# EAGLE board Eagle_LED (EAGLE 6.6.0)
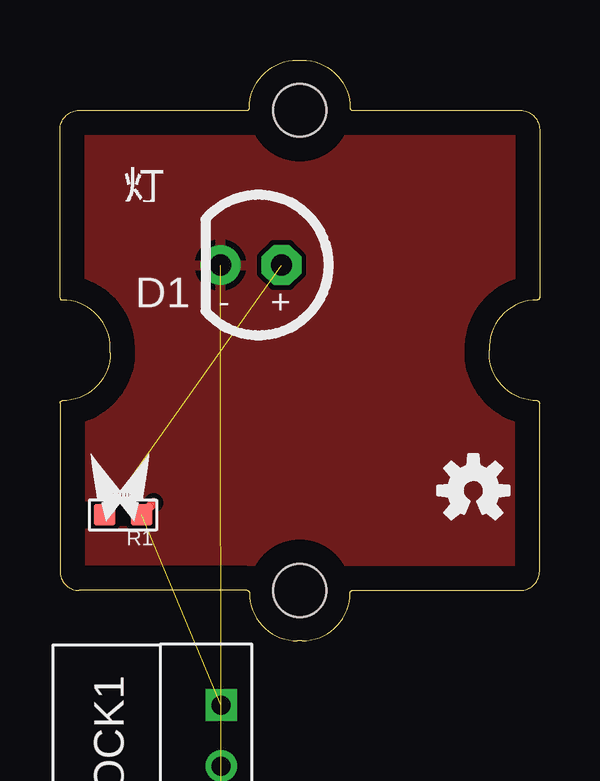
[diagram p0: board, top side]
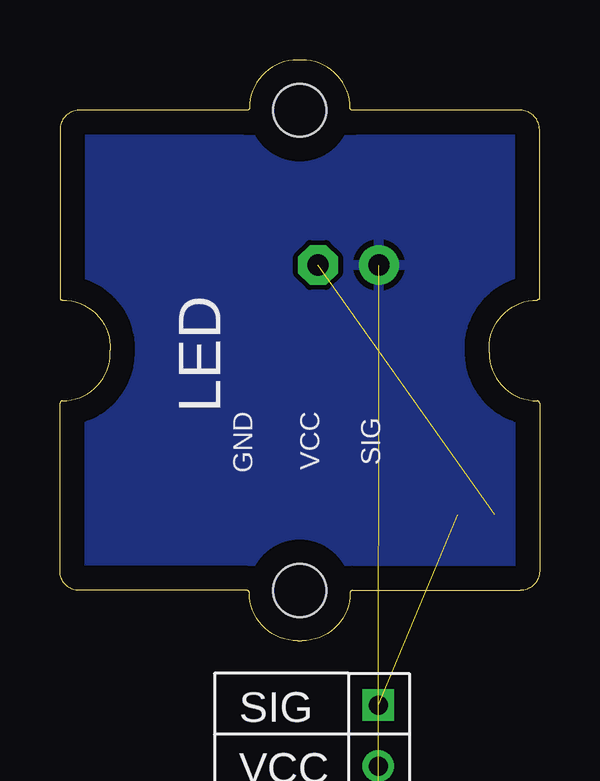
[diagram p1: board, bottom side, seen from below]

Size 20 x 24.2 mm. Coordinates in mm from the lower left corner, seen from the top.
Copper layers (1*16): Top 0.035mm / dielectric 1.5mm / Bottom 0.035mm
Design rules "default": minimum track width 10mil, minimum drill 24mil, track to track 8mil, track to pad 8mil, pad to pad 8mil, via to via 8mil, smd to smd 8mil, copper to edge 40mil, drill to drill 8mil, minimum pad ring 10mil, minimum via ring 8mil, stop-mask expansion 4mil, vias tented up to drill 0mil, thermal gap 10mil

## Footprints (pad centres in the part's own frame; a part is rotated, then mirrored left to right if it is on the bottom)
LED-2P-2.54-6MM = drill 0.889 pad 1.651 octagon: + -1.27,0 | drill 0.889 pad 1.651: - 1.27,0
HEAD_LOCK = drill 0.8 square: 1 0.025,2.489 | drill 0.8: 2 0.025,-0.051; 3 0.025,-2.591
0603 = smd 0.889 x 0.889: 1 -0.762,0; 2 0.762,0
DIMENSION = hole 2.2: 0,-6.19; 0,13.81

## Placement (x,y rotation side)
D1  [LED-2P-2.54-6MM]  7.97,15.66 180 top
HEAD_LOCK1  HEAD_LOCK  [HEAD_LOCK]  6.7,-5.17 0 top
R1  1K  [0603]  2.63,5.24 180 top
U$2  DIMENSION  [DIMENSION]  10,8.29 0 top
U$4  XMAKERLOGO  [XMAKERLOGO]  0.6,4.48 0 top
U$6  [OSHW-LOGO-S]  17.24,6.26 0 top

## Library data of the parts
D1 R1 = Discrete
HEAD_LOCK1 = Xmaker_yuhuilbr
U$2 = Xmaker_yuhui
U$4 = switch-tact
U$6 = SparkFun-Aesthetics

## Nets
GND: D1.- HEAD_LOCK1.3
N$1: D1.+ R1.2
SIG: HEAD_LOCK1.1 R1.1
VCC: HEAD_LOCK1.2

## Tracks (layer width: path | path; a pad name or v marks a point on that pad's centre or on a via)
GND  (1 unrouted)
  pour Top: -0.16,23.28 20.16,23.28 20.16,22.51 20.16,1.43 0.09,1.43 0.09,2.19 -0.16,2.19
  pour Bottom: -0.16,23.28 20.16,23.28 20.16,23.02 20.16,1.18 -0.16,1.18 -0.16,1.43
N$1  (1 unrouted)
SIG  (1 unrouted)
  Top 0.406: R1.1 3.9,5.75

## Text on the board
bPlace: LED | VCC | GND | SIG